# Altium PCB 拼板2.PcbDoc
Units mil, origin at the board's own origin, x right, y up, seen from the top; angles counter-clockwise.
Board outline 3265 x 493.35 mil, 2 copper layers (Top Layer, Bottom Layer); 27 components, 0 nets, 108 pads, 50 vias.
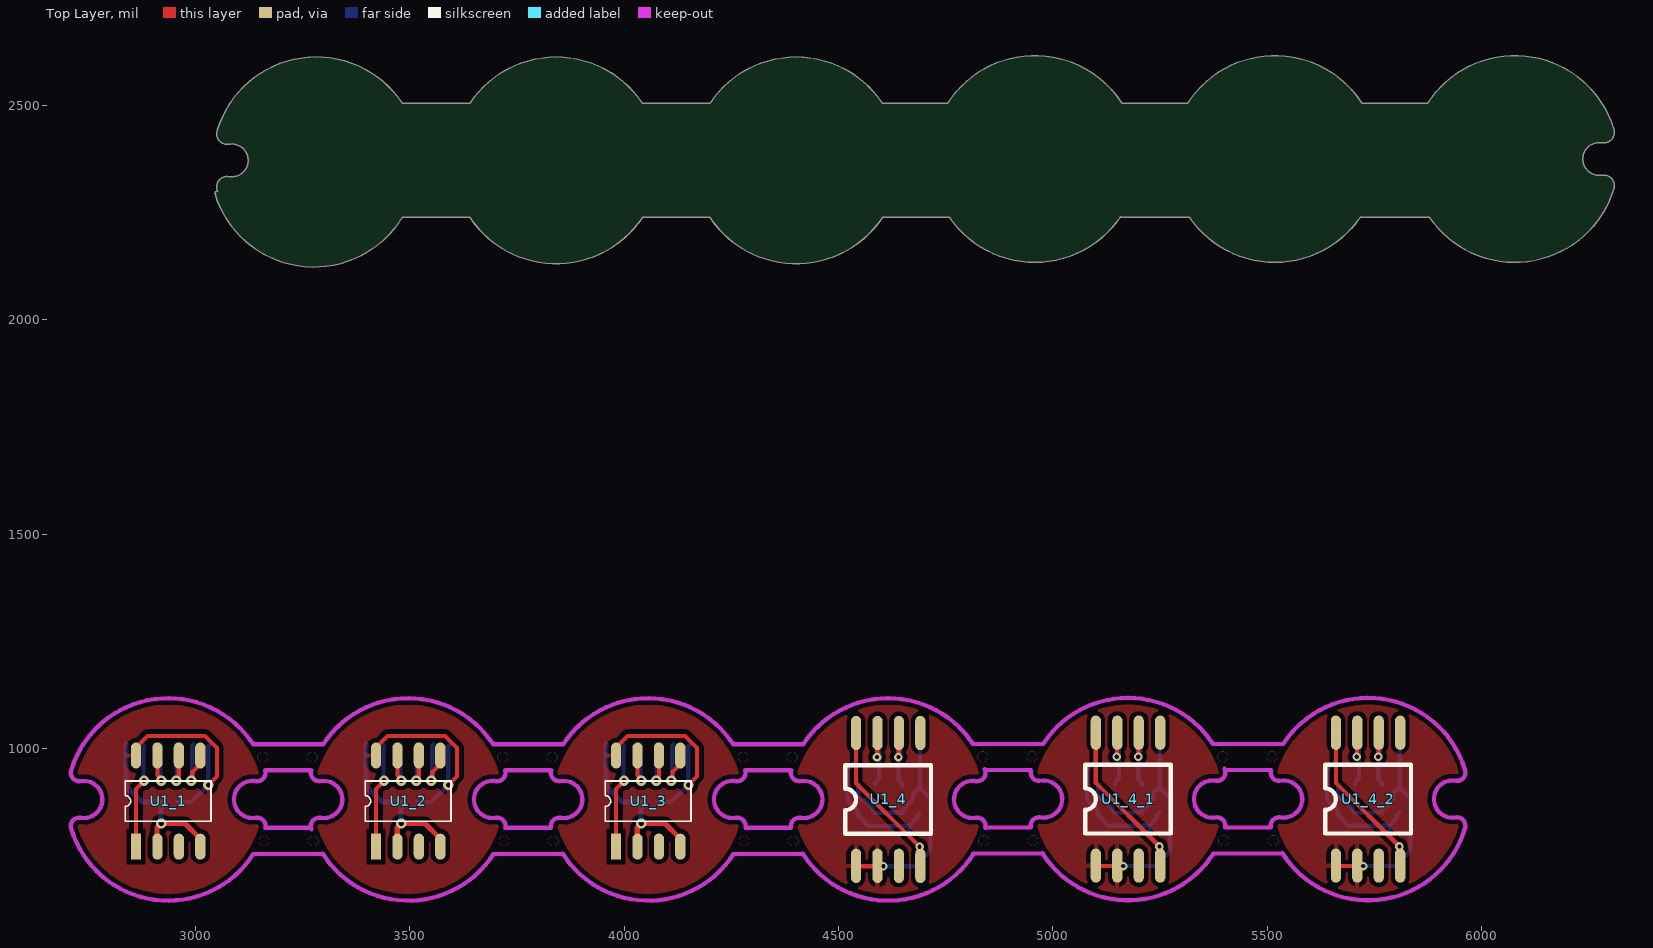
[diagram p0: Top Layer view]
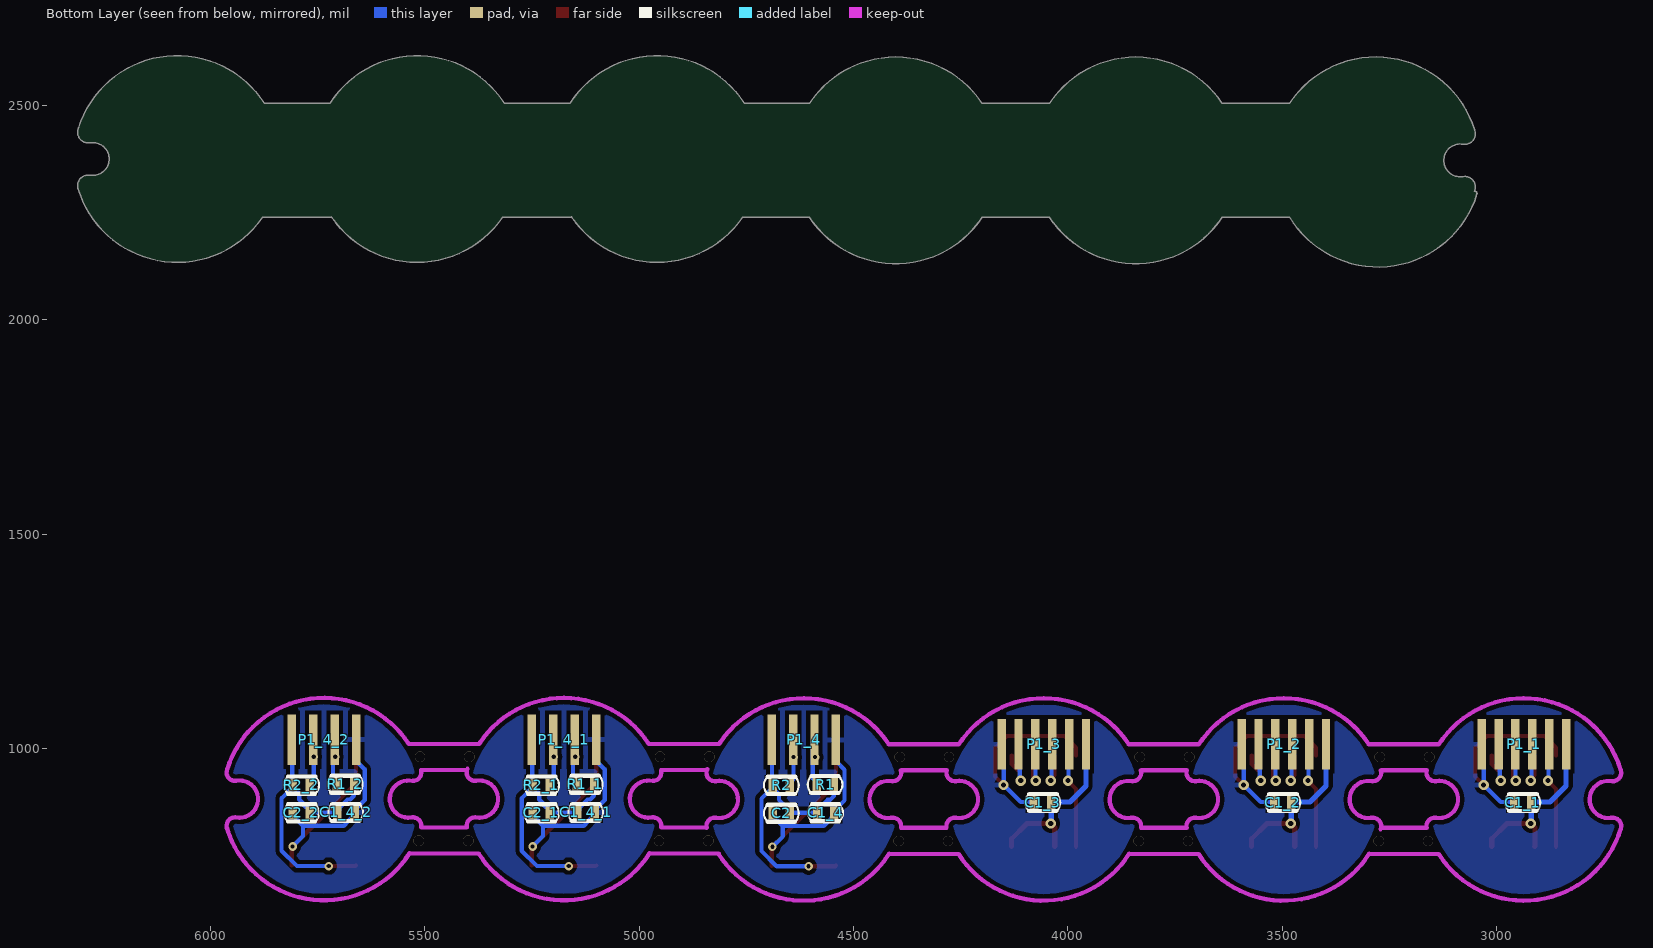
[diagram p1: Bottom Layer view, seen from below]

## Layer stack, top to bottom
Top Solder: solder mask 0.4, Solder Resist, Dk 3.5
Top Layer: signal copper 1.4
Dielectric 1: dielectric 12.6, FR-4, Dk 4.8
Bottom Layer: signal copper 1.4
Bottom Solder: solder mask 0.4, Solder Resist, Dk 3.5

## Board outline
3045.62,2293.44 cw(c3050.41,2294.92) 3051.63,2299.78 cw(c3055.74,2302.65) 3051.09,2300.8 cw(c3074.03,2309.93) 3078.35,2334.25 cw(c3078.67,2329.25) 3079.36,2334.21 ccw(c3084.66,2372.14) 3122.96,2372.14 ccw(c3084.66,2372.14) 3075.85,2409.4 cw(c3074.7,2414.28) 3072.71,2409.68 cw(c3074.03,2434.34) 3051.01,2443.28 cw(c3281.51,2372.14) 3482.23,2505.96 3640.8,2505.96 cw(c3841.51,2372.14) 4042.23,2505.96 4200.8,2505.96 cw(c4401.51,2372.14) 4602.23,2505.96 4755.35,2505.96 cw(c4958.22,2375.43) 5161.12,2505.92 cw(c5161.81,2500.95) 5161.81,2505.96 5315.35,2505.96 cw(c5518.22,2375.43) 5721.12,2505.92 cw(c5721.81,2500.95) 5721.81,2505.96 5875.35,2505.96 cw(c6078.22,2375.43) 6308.35,2447.78 cw(c6303.56,2446.28) 6308.51,2447.11 cw(c6285.7,2437.64) 6310.4,2437.64 cw(c6285.7,2437.64) 6283.03,2413.08 cw(c6282.61,2418.08) 6281.73,2413.14 ccw(c6275.07,2375.43) 6281.43,2337.67 cw(c6282.26,2332.73) 6282.59,2337.73 cw(c6285.7,2313.23) 6310.4,2313.23 cw(c6285.7,2313.23) 6309.89,2308.23 cw(c6304.98,2309.25) 6309.79,2307.84 cw(c6078.22,2375.43) 5878.6,2239.99 5720,2239.99 cw(c5720,2245) 5718.09,2240.36 cw(c5518.22,2375.43) 5318.6,2239.99 5160,2239.99 cw(c5160,2245) 5158.09,2240.36 cw(c4958.22,2375.43) 4758.6,2239.99 4603.33,2239.99 cw(c4401.51,2372.14) 4199.7,2239.99 4043.33,2239.99 cw(c3841.51,2372.14) 3639.7,2239.99 3482.85,2239.99 cw(c3276.18,2364.4)

## Design rules (kind name [scope] priority, off if disabled: settings)
Clearance [All] p1: gap=10 ignorepadtopadclearanceinfootprint=FALSE except(0: Arc-Hole Track-Hole SMDPad-Hole THPad-Hole Via-Hole Fill-Hole Poly-Hole Region-Hole Text-Hole)
PolygonConnect [All] p1: connectstyle=Relief reliefconductorwidth=10 reliefentries=4 polygonreliefangle="90 Angle" airgapwidth=10
RoutingVias [All] p1: holewidth=28 width=50 viastyle="Through Hole" minholewidth=28 minwidth=50 maxholewidth=28 maxwidth=50
SolderMaskExpansion [All] p1: expansion=4 istentingtop=FALSE
Width [All] p1: maxlimit=10 minlimit=10 preferedwidth=10
30 further rules are at their usual default settings.

## Components (designator, comment, footprint, x,y, rotation, side; value= is the part's Value field where it differs from the comment)
C1_1 "Cap" 0402-r 2920,875 r0 bottom (schematic designator C1)
C1_2 "Cap" 0402-r 3480,875 r0 bottom (schematic designator C1)
C1_3 "Cap" 0402-r 4040,875 r0 bottom (schematic designator C1)
C1_4 "Cap" 0402-r 4584,849 r180 bottom value=100nF (schematic designator C1)
C1_4_1 "Cap" 0402-r 5143.49,849.72 r180 bottom value=100nF (schematic designator C1)
C1_4_2 "Cap" 0402-r 5703.49,849.72 r180 bottom value=100nF (schematic designator C1)
C2 "Cap" 0402-r 4650,850 r0 bottom value=1uF
C2_1 "Cap" 0402-r 5209.49,850.72 r0 bottom value=1uF (schematic designator C2)
C2_2 "Cap" 0402-r 5769.49,850.72 r0 bottom value=1uF (schematic designator C2)
P1_1 "Header 6" 6-pin 2936.22,1010 r180 bottom (schematic designator P1)
P1_2 "Header 6" 6-pin 3496.22,1010 r180 bottom (schematic designator P1)
P1_3 "Header 6" 6-pin 4056.22,1010 r180 bottom (schematic designator P1)
P1_4 "Header 4" 4-pin 4616.22,1020 r0 bottom (schematic designator P1)
P1_4_1 "Header 4" 4-pin 5175.71,1020.72 r0 bottom (schematic designator P1)
P1_4_2 "Header 4" 4-pin 5735.71,1020.72 r0 bottom (schematic designator P1)
R1 "Res1" 0402-r 4585,915 r180 bottom value=4.7K
R1_1 "Res1" 0402-r 5144.49,915.72 r180 bottom value=4.7K (schematic designator R1)
R1_2 "Res1" 0402-r 5704.49,915.72 r180 bottom value=4.7K (schematic designator R1)
R2 "Res1" 0402-r 4650,915 r0 bottom value=4.7K
R2_1 "Res1" 0402-r 5209.49,915.72 r0 bottom value=4.7K (schematic designator R2)
R2_2 "Res1" 0402-r 5769.49,915.72 r0 bottom value=4.7K (schematic designator R2)
U1_1 "MT6816" SOP8 2861.22,770.98 r90 top locked (schematic designator U1)
U1_2 "MT6816" SOP8 3421.22,770.98 r90 top locked (schematic designator U1)
U1_3 "MT6816" SOP8 3981.22,770.98 r90 top locked (schematic designator U1)
U1_4 "AS5600" SOIC8 4616.22,881.22 r90 top locked (schematic designator U1)
U1_4_1 "AS5600" SOIC8 5175.71,881.94 r90 top locked (schematic designator U1)
U1_4_2 "AS5600" SOIC8 5735.71,881.94 r90 top locked (schematic designator U1)

## Footprints (in the part's own frame and the unit in brackets; to place one, negate y for a bottom-side part, rotate by r counter-clockwise, add the part's x,y. Pads: shape width x height; smd on the part's side, far side on the other; paste and mask are expansions set on the pad)
4-pin [mm]
  rect 0.5x3 smd: 1(-1.905,0) 2(-0.635,0) 3(0.635,0) 4(1.905,0)
6-pin [mm]
  rect 0.5x3 smd: 1(-2.5,0) 2(-1.5,0) 3(-0.5,0) 4(0.5,0) 5(1.5,0) 6(2.5,0)
0402-r [mil]
  rect 20x30 smd: 1(-1,1) 2(39,1)
  silkscreen extent -22,-19 59,21
SOIC8 [mil]
  oval 80x24 smd: 1(-155,75) 2(-155,25) 3(-155,-25) 4(-155,-75) 5(155,-75) 6(155,-25) 7(155,25) 8(155,75)
  silkscreen extent -80,-100 80,100
SOP8 [mil]
  rect 61x24 smd: 1(0,0)
  oval 61x24 smd: 2(0,-50) 3(0,-100) 4(0,-150) 5(212.6,-150) 6(212.6,-100) 7(212.6,-50) 8(212.6,0)
  silkscreen extent 60,-175 153,25

## Part data
C1_1 C1_2 C1_3 C1_4 C1_4_1 C1_4_2 C2 C2_1 C2_2: library part "Cap Semi", "Capacitor (Semiconductor SIM Model)", LatestRevisionDate=29-May-2009, LatestRevisionNote="IPC-7351 Footprint Added.", PackageDescription="Chip Capacitor", PackageReference=C1206, Published=8-Jun-2000, Publisher="Altium Limited"
P1_1 P1_2 P1_3: "Header, 6-Pin", LatestRevisionDate=17-Jul-2002, LatestRevisionNote="Re-released for DXP Platform.", Publisher="Altium Limited"
P1_4 P1_4_1 P1_4_2: "Header, 4-Pin", LatestRevisionDate=17-Jul-2002, LatestRevisionNote="Re-released for DXP Platform.", Publisher="Altium Limited"
R1 R1_1 R1_2 R2 R2_1 R2_2: "Resistor", LatestRevisionDate=17-Jul-2002, LatestRevisionNote="Re-released for DXP Platform.", PackageDescription="Axial Device, Thru-Hole; 2 Leads; 0.3 in Pin Spacing", PackageReference=AXIAL-0.3, Published=8-Jun-2000, Publisher="Altium Limited"

## Via types
v1: diameter 24, hole 24, Top Layer to Bottom Layer, 20 vias
v2: diameter 24, hole 12, Top Layer to Bottom Layer, 18 vias
v3: diameter 20, hole 10, Top Layer to Bottom Layer, 12 vias

## Nets (pads, with @x,y where several pads share a name; then routed paths per layer and width w, separated by ;. In a path a pad name is that pad's centre, name@x,y a point inside that pad or via, vN(x,y) a via of type N, cw(c..) or ccw(c..) an arc to the next point about the centre after c; other vN are vias at no path point)
pads on no net: C1_1.1 C1_1.2 C1_2.1 C1_2.2 C1_3.1 C1_3.2 C1_4.1 C1_4.2 C1_4_1.1 C1_4_1.2 C1_4_2.1 C1_4_2.2 C2.1 C2.2 C2_1.1 C2_1.2 C2_2.1 C2_2.2 P1_1.1 P1_1.2 P1_1.3 P1_1.4 P1_1.5 P1_1.6 P1_2.1 P1_2.2 P1_2.3 P1_2.4 P1_2.5 P1_2.6 P1_3.1 P1_3.2 P1_3.3 P1_3.4 P1_3.5 P1_3.6 P1_4.1 P1_4.2 P1_4.3 P1_4.4 P1_4_1.1 P1_4_1.2 P1_4_1.3 P1_4_1.4 P1_4_2.1 P1_4_2.2 P1_4_2.3 P1_4_2.4 R1.1 R1.2 R1_1.1 R1_1.2 R1_2.1 R1_2.2 R2.1 R2.2 R2_1.1 R2_1.2 R2_2.1 R2_2.2 U1_1.1 U1_1.2 U1_1.3 U1_1.4 U1_1.5 U1_1.6 U1_1.7 U1_1.8 U1_2.1 U1_2.2 U1_2.3 U1_2.4 U1_2.5 U1_2.6 U1_2.7 U1_2.8 U1_3.1 U1_3.2 U1_3.3 U1_3.4 U1_3.5 U1_3.6 U1_3.7 U1_3.8 U1_4.1 U1_4.2 U1_4.3 U1_4.4 U1_4.5 U1_4.6 U1_4.7 U1_4.8 U1_4_1.1 U1_4_1.2 U1_4_1.3 U1_4_1.4 U1_4_1.5 U1_4_1.6 U1_4_1.7 U1_4_1.8 U1_4_2.1 U1_4_2.2 U1_4_2.3 U1_4_2.4 U1_4_2.5 U1_4_2.6 U1_4_2.7 U1_4_2.8
copper on no net: | length 10491.4
  Top Layer w10: 2861.22,770.98 2861.22,905.6 2880,924.38 v2(2880,925) ; 2861.22,983.58 2861.22,1002.08 2888.22,1029.08 3022.4,1029.08 3050,1001.49 3050,935 v2(3030,915) ; 2911.22,983.58 2911.22,937.57 2920,928.79 v2(2920,925) ; v2(2955,925) 2955,928.79 2961.22,935.01 2961.22,983.58 ; v2(2990,925) 2992.68,927.68 2992.68,945.44 3011.22,963.98 3011.22,983.58 ; 3421.22,770.98 3421.22,905.6 3440,924.38 v2(3440,925) ; 3421.22,983.58 3421.22,1002.08 3448.22,1029.08 3582.4,1029.08 3610,1001.49 3610,935 v2(3590,915) ; 3471.22,983.58 3471.22,937.57 3480,928.79 v2(3480,925) ; v2(3515,925) 3515,928.79 3521.22,935.01 3521.22,983.58 ; v2(3550,925) 3552.68,927.68 3552.68,945.44 3571.22,963.98 3571.22,983.58 ; 3981.22,770.98 3981.22,905.6 4000,924.38 v2(4000,925) ; 3981.22,983.58 3981.22,1002.08 4008.22,1029.08 4142.4,1029.08 4170,1001.49 4170,935 v2(4150,915) ; 4031.22,983.58 4031.22,937.57 4040,928.79 v2(4040,925) ; v2(4075,925) 4075,928.79 4081.22,935.01 4081.22,983.58 ; v2(4110,925) 4112.68,927.68 4112.68,945.44 4131.22,963.98 4131.22,983.58 ; 4541.22,726.22 4542.44,725 v3(4605,725) ; 4541.22,1036.22 4541.22,918.78 4691.22,768.78 4691.22,726.22 ; v3(4590,980) 4590.61,980.61 4590.61,1035.61 4591.22,1036.22 ; v3(4640,980) 4640.61,980.61 4640.61,1035.61 4641.22,1036.22 ; 5100.71,726.94 5101.93,725.72 v3(5164.49,725.72) ; 5100.71,1036.94 5100.71,919.5 5250.71,769.5 5250.71,726.94 ; v3(5149.49,980.72) 5150.1,981.33 5150.1,1036.33 5150.71,1036.94 ; v3(5199.49,980.72) 5200.1,981.33 5200.1,1036.33 5200.71,1036.94 ; 5660.71,726.94 5661.93,725.72 v3(5724.49,725.72) ; 5660.71,1036.94 5660.71,919.5 5810.71,769.5 5810.71,726.94 ; v3(5709.49,980.72) 5710.1,981.33 5710.1,1036.33 5710.71,1036.94 ; v3(5759.49,980.72) 5760.1,981.33 5760.1,1036.33 5760.71,1036.94
  Top Layer w12: 2911.22,770.98 2910.61,771.59 2910.61,815.61 v2(2920,825) 2975.7,825 3011.22,789.48 3011.22,770.98 ; 3471.22,770.98 3470.61,771.59 3470.61,815.61 v2(3480,825) 3535.7,825 3571.22,789.48 3571.22,770.98 ; 4031.22,770.98 4030.61,771.59 4030.61,815.61 v2(4040,825) 4095.7,825 4131.22,789.48 4131.22,770.98
  Bottom Layer w10: 2877.16,1010 2878.58,1008.58 2878.58,926.42 v2(2880,925) ; 2916.53,1010 2918.27,1008.27 2918.27,926.73 v2(2920,925) ; v2(2955,925) 2955.45,925.45 2955.45,1009.55 2955.91,1010 ; 2959,874 2960,875 2990,875 3029.8,914.8 3029.8,1005.16 3034.65,1010 ; v2(2990,925) 2992.64,927.64 2992.64,1007.36 2995.28,1010 ; 3437.16,1010 3438.58,1008.58 3438.58,926.42 v2(3440,925) ; 3476.53,1010 3478.27,1008.27 3478.27,926.73 v2(3480,925) ; v2(3515,925) 3515.45,925.45 3515.45,1009.55 3515.91,1010 ; 3519,874 3520,875 3550,875 3589.8,914.8 3589.8,1005.16 3594.65,1010 ; v2(3550,925) 3552.64,927.64 3552.64,1007.36 3555.28,1010 ; 3997.16,1010 3998.58,1008.58 3998.58,926.42 v2(4000,925) ; 4036.53,1010 4038.27,1008.27 4038.27,926.73 v2(4040,925) ; v2(4075,925) 4075.45,925.45 4075.45,1009.55 4075.91,1010 ; 4079,874 4080,875 4110,875 4149.8,914.8 4149.8,1005.16 4154.65,1010 ; v2(4110,925) 4112.64,927.64 4112.64,1007.36 4115.28,1010 ; 4541.22,1020 4541.22,970.79 4521,950.57 4521,879 4545,855 4545,850 4545,845 4560,830 4560,828.79 4569.79,819 4665.21,819 4684,837.79 4684,844 4689,849 ; 4546,916 4546,889 4554.89,880.11 4561.11,880.11 4580,861.21 4580,855 4585,850 4648,850 4649,849 4649,854 4664.39,869.39 4664.39,870.61 4674,880.21 4674,894 4690.11,910.11 ; 4586,916 4586,921 4595,930 4595,1016.22 4591.22,1020 ; v3(4605,725) 4679.14,725 4715,760.86 4715,883 4690.11,907.89 4690.11,910.11 ; v3@4645,975 4645,1016.22 4641.22,1020 4640,1018.78 v3(4640,980) 4640,928 4649,919 4649,914 ; 4665,819 4665,795 v3(4689.39,770.61) ; 4691.22,1020 4690.11,1018.89 4690.11,910.11 ; 5100.71,1020.72 5100.71,971.51 5080.49,951.29 5080.49,879.72 5104.49,855.72 5104.49,850.72 5104.49,845.72 5119.49,830.72 5119.49,829.51 5129.27,819.72 5224.7,819.72 5243.49,838.51 5243.49,844.72 5248.49,849.72 ; 5105.49,916.72 5105.49,889.72 5114.38,880.83 5120.59,880.83 5139.49,861.94 5139.49,855.72 5144.49,850.72 5207.49,850.72 5208.49,849.72 5208.49,854.72 5223.88,870.12 5223.88,871.33 5233.49,880.94 5233.49,894.72 5249.6,910.83 ; 5145.49,916.72 5145.49,921.72 5154.49,930.72 5154.49,1016.94 5150.71,1020.72 ; v3(5164.49,725.72) 5238.63,725.72 5274.49,761.58 5274.49,883.72 5249.6,908.61 5249.6,910.83 ; v3@5204.49,975.72 5204.49,1016.94 5200.71,1020.72 5199.49,1019.5 v3(5199.49,980.72) 5199.49,928.72 5208.49,919.72 5208.49,914.72 ; 5224.49,819.72 5224.49,795.72 v3(5248.88,771.33) ; 5250.71,1020.72 5249.6,1019.61 5249.6,910.83 ; 5660.71,1020.72 5660.71,971.51 5640.49,951.29 5640.49,879.72 5664.49,855.72 5664.49,850.72 5664.49,845.72 5679.49,830.72 5679.49,829.51 5689.27,819.72 5784.7,819.72 5803.49,838.51 5803.49,844.72 5808.49,849.72 ; 5665.49,916.72 5665.49,889.72 5674.38,880.83 5680.59,880.83 5699.49,861.94 5699.49,855.72 5704.49,850.72 5767.49,850.72 5768.49,849.72 5768.49,854.72 5783.88,870.12 5783.88,871.33 5793.49,880.94 5793.49,894.72 5809.6,910.83 ; 5705.49,916.72 5705.49,921.72 5714.49,930.72 5714.49,1016.94 5710.71,1020.72 ; v3(5724.49,725.72) 5798.63,725.72 5834.49,761.58 5834.49,883.72 5809.6,908.61 5809.6,910.83 ; v3@5764.49,975.72 5764.49,1016.94 5760.71,1020.72 5759.49,1019.5 v3(5759.49,980.72) 5759.49,928.72 5768.49,919.72 5768.49,914.72 ; 5784.49,819.72 5784.49,795.72 v3(5808.88,771.33) ; 5810.71,1020.72 5809.6,1019.61 5809.6,910.83
  Bottom Layer w12: 2837.79,1010 2837.79,912.21 2875,875 2920,875 ; 2919,874 2919,826 v2(2920,825) ; 3397.79,1010 3397.79,912.21 3435,875 3480,875 ; 3479,874 3479,826 v2(3480,825) ; 3957.79,1010 3957.79,912.21 3995,875 4040,875 ; 4039,874 4039,826 v2(4040,825)
  other v1: 3159.71,784.08 3274.71,784.08 3719.71,784.08 3834.71,784.08 4279.71,784.08 4394.71,784.08 4839.19,784.81 4954.19,784.81 5399.19,784.81 5514.19,784.81 3157.15,980.03 3272.15,980.03 3717.15,980.03 3832.15,980.03 4277.15,980.03 4392.15,980.03 4836.64,980.75 4951.64,980.75 5396.64,980.75 5511.64,980.75

## Polygon pours and split planes (outlines as drawn)
no net on Top Layer "Top Layer-No Net" (solid, pour order 50): 5509.94,812.46 cw(c5528.23,819.74) 5532.84,838.88 5532.86,839.05 ccw(c5538.86,881.94) 5528.89,924.09 5528.8,924.47 cw(c5528.23,944.15) 5509.94,951.43 cw(c5735.71,881.94) 5961.05,952.79 5960.91,952.72 cw(c5943.19,944.15) 5940.11,924.7 5940.09,924.59 ccw(c5932.56,881.94) 5939.75,839.24 5939.77,839.12 cw(c5943.19,819.74) 5962.46,815.75 cw(c5735.71,881.94)
no net on Top Layer "Top Layer-No Net" (solid, pour order 48): 4949.94,812.46 cw(c4968.23,819.74) 4972.84,838.88 4972.86,839.05 ccw(c4978.86,881.94) 4968.89,924.09 4968.8,924.47 cw(c4968.23,944.15) 4949.94,951.43 cw(c5175.71,881.94) 5401.05,952.79 5400.91,952.72 cw(c5383.19,944.15) 5380.11,924.7 5380.09,924.59 ccw(c5372.56,881.94) 5379.75,839.24 5379.77,839.12 cw(c5383.19,819.74) 5402.46,815.75 cw(c5175.71,881.94)
no net on Top Layer "Top Layer-No Net" (solid, pour order 46): 4390.45,811.73 cw(c4408.74,819.02) 4413.35,838.15 4413.38,838.33 ccw(c4419.37,881.22) 4409.4,923.36 4409.31,923.75 cw(c4408.74,943.42) 4390.45,950.71 cw(c4616.22,881.22) 4841.57,952.06 4841.42,951.99 cw(c4823.7,943.42) 4820.63,923.98 4820.61,923.87 ccw(c4813.07,881.22) 4820.26,838.51 4820.28,838.4 cw(c4823.7,819.02) 4842.98,815.03 cw(c4616.22,881.22)
no net on Top Layer "Top Layer-No Net" (solid, pour order 38): 3830.45,811.73 cw(c3848.74,819.02) 3853.35,838.15 3853.38,838.33 ccw(c3859.37,881.22) 3849.4,923.36 3849.31,923.75 cw(c3848.74,943.42) 3830.45,950.71 cw(c4056.22,881.22) 4281.57,952.06 4281.42,951.99 cw(c4263.7,943.42) 4260.63,923.98 4260.61,923.87 ccw(c4253.07,881.22) 4260.26,838.51 4260.28,838.4 cw(c4263.7,819.02) 4282.98,815.03 cw(c4056.22,881.22)
no net on Top Layer "Top Layer-No Net" (solid, pour order 36): 3270.45,811.73 cw(c3288.74,819.02) 3293.35,838.15 3293.38,838.33 ccw(c3299.37,881.22) 3289.4,923.36 3289.31,923.75 cw(c3288.74,943.42) 3270.45,950.71 cw(c3496.22,881.22) 3721.57,952.06 3721.42,951.99 cw(c3703.7,943.42) 3700.63,923.98 3700.61,923.87 ccw(c3693.07,881.22) 3700.26,838.51 3700.28,838.4 cw(c3703.7,819.02) 3722.98,815.03 cw(c3496.22,881.22)
no net on Top Layer "Top Layer-No Net" (solid, pour order 34): 2710.45,811.73 cw(c2728.74,819.02) 2733.35,838.15 2733.38,838.33 ccw(c2739.37,881.22) 2729.4,923.36 2729.31,923.75 cw(c2728.74,943.42) 2710.45,950.71 cw(c2936.22,881.22) 3161.57,952.06 3161.42,951.99 cw(c3143.7,943.42) 3140.63,923.98 3140.61,923.87 ccw(c3133.07,881.22) 3140.26,838.51 3140.28,838.4 cw(c3143.7,819.02) 3162.98,815.03 cw(c2936.22,881.22)
no net on Bottom Layer "Top Layer-No Net1" (solid, pour order 51): 5509.94,812.46 cw(c5528.23,819.74) 5532.84,838.88 5532.86,839.05 ccw(c5538.86,881.94) 5528.89,924.09 5528.8,924.47 cw(c5528.23,944.15) 5509.94,951.43 cw(c5735.71,881.94) 5961.05,952.79 5960.91,952.72 cw(c5943.19,944.15) 5940.11,924.7 5940.09,924.59 ccw(c5932.56,881.94) 5939.75,839.24 5939.77,839.12 cw(c5943.19,819.74) 5962.46,815.75 cw(c5735.71,881.94)
no net on Bottom Layer "Top Layer-No Net1" (solid, pour order 49): 4949.94,812.46 cw(c4968.23,819.74) 4972.84,838.88 4972.86,839.05 ccw(c4978.86,881.94) 4968.89,924.09 4968.8,924.47 cw(c4968.23,944.15) 4949.94,951.43 cw(c5175.71,881.94) 5401.05,952.79 5400.91,952.72 cw(c5383.19,944.15) 5380.11,924.7 5380.09,924.59 ccw(c5372.56,881.94) 5379.75,839.24 5379.77,839.12 cw(c5383.19,819.74) 5402.46,815.75 cw(c5175.71,881.94)
no net on Bottom Layer "Top Layer-No Net1" (solid, pour order 47): 4390.45,811.73 cw(c4408.74,819.02) 4413.35,838.15 4413.38,838.33 ccw(c4419.37,881.22) 4409.4,923.36 4409.31,923.75 cw(c4408.74,943.42) 4390.45,950.71 cw(c4616.22,881.22) 4841.57,952.06 4841.42,951.99 cw(c4823.7,943.42) 4820.63,923.98 4820.61,923.87 ccw(c4813.07,881.22) 4820.26,838.51 4820.28,838.4 cw(c4823.7,819.02) 4842.98,815.03 cw(c4616.22,881.22)
no net on Bottom Layer "Top Layer-No Net1" (solid, pour order 39): 3830.45,811.73 cw(c3848.74,819.02) 3853.35,838.15 3853.38,838.33 ccw(c3859.37,881.22) 3849.4,923.36 3849.31,923.75 cw(c3848.74,943.42) 3830.45,950.71 cw(c4056.22,881.22) 4281.57,952.06 4281.42,951.99 cw(c4263.7,943.42) 4260.63,923.98 4260.61,923.87 ccw(c4253.07,881.22) 4260.26,838.51 4260.28,838.4 cw(c4263.7,819.02) 4282.98,815.03 cw(c4056.22,881.22)
no net on Bottom Layer "Top Layer-No Net1" (solid, pour order 37): 3270.45,811.73 cw(c3288.74,819.02) 3293.35,838.15 3293.38,838.33 ccw(c3299.37,881.22) 3289.4,923.36 3289.31,923.75 cw(c3288.74,943.42) 3270.45,950.71 cw(c3496.22,881.22) 3721.57,952.06 3721.42,951.99 cw(c3703.7,943.42) 3700.63,923.98 3700.61,923.87 ccw(c3693.07,881.22) 3700.26,838.51 3700.28,838.4 cw(c3703.7,819.02) 3722.98,815.03 cw(c3496.22,881.22)
no net on Bottom Layer "Top Layer-No Net1" (solid, pour order 35): 2710.45,811.73 cw(c2728.74,819.02) 2733.35,838.15 2733.38,838.33 ccw(c2739.37,881.22) 2729.4,923.36 2729.31,923.75 cw(c2728.74,943.42) 2710.45,950.71 cw(c2936.22,881.22) 3161.57,952.06 3161.42,951.99 cw(c3143.7,943.42) 3140.63,923.98 3140.61,923.87 ccw(c3133.07,881.22) 3140.26,838.51 3140.28,838.4 cw(c3143.7,819.02) 3162.98,815.03 cw(c2936.22,881.22)

## Keep-outs
Keep-Out Layer:
  lines w10: 2729.31,923.75 cw(c2728.74,943.42) 2710.45,950.71 cw(c2936.22,881.22) 3134.43,1009.73 ; 2729.4,923.36 cw(c2739.37,881.22) 2733.38,838.33 ; 2733.35,838.15 ccw(c2728.74,819.02) 2710.45,811.73 ccw(c2936.22,881.22) 3135.31,754.08 3295.35,754.08 ; 3134.9,1010.03 3297.15,1010.03 ; 3140.26,838.51 cw(c3133.07,881.22) 3140.61,923.87 ; 3140.28,838.4 cw(c3143.7,819.02) 3162.98,815.03 3267.15,815.03 ; 3140.63,923.98 ccw(c3143.7,943.42) 3162.71,948.54 ; 3162.71,949.08 3268.88,949.08 ; 3269.81,948.82 ccw(c3288.74,943.42) 3289.31,923.75 ; 3270.45,811.73 cw(c3288.74,819.02) 3293.35,838.15 ; 3289.4,923.36 cw(c3299.37,881.22) 3293.38,838.33 ; 3296.62,754.89 ccw(c3496.22,881.22) 3695.31,754.08 3855.35,754.08 ; 3297.9,1009.55 cw(c3496.22,881.22) 3694.43,1009.73 ; 3694.9,1010.03 3857.15,1010.03 ; 3700.26,838.51 cw(c3693.07,881.22) 3700.61,923.87 ; 3700.28,838.4 cw(c3703.7,819.02) 3722.98,815.03 3827.15,815.03 ; 3700.63,923.98 ccw(c3703.7,943.42) 3722.71,948.54 ; 3722.71,949.08 3828.88,949.08 ; 3829.38,815.44 cw(c3848.74,819.02) 3853.35,838.15 ; 3829.81,948.82 ccw(c3848.74,943.42) 3849.31,923.75 ; 3849.4,923.36 cw(c3859.37,881.22) 3853.38,838.33 ; 3856.62,754.89 ccw(c4056.22,881.22) 4255.31,754.08 4415.35,754.08 ; 3857.9,1009.55 cw(c4056.22,881.22) 4254.43,1009.73 ; 4254.9,1010.03 4417.15,1010.03 ; 4260.26,838.51 cw(c4253.07,881.22) 4260.61,923.87 ; 4260.28,838.4 cw(c4263.7,819.02) 4282.98,815.03 4387.15,815.03 ; 4260.63,923.98 ccw(c4263.7,943.42) 4282.71,948.54 ; 4282.71,949.08 4388.88,949.08 ; 4389.38,815.44 cw(c4408.74,819.02) 4413.35,838.15 ; 4389.81,948.82 ccw(c4408.74,943.42) 4409.31,923.75 ; 4409.4,923.36 cw(c4419.37,881.22) 4413.38,838.33 ; 4416.62,754.89 ccw(c4616.22,881.22) 4815.77,754.81 ; 4417.9,1009.55 cw(c4616.22,881.22) 4813.95,1010.47 ; 4814.39,1010.75 4976.64,1010.75 ; 4814.79,754.81 4974.83,754.81 ; 4820.26,838.51 cw(c4813.07,881.22) 4820.61,923.87 ; 4820.28,838.4 cw(c4823.7,819.02) 4842.98,815.03 ; 4820.63,923.98 ccw(c4823.7,943.42) 4841.42,951.99 ; 4842.19,949.81 4948.37,949.81 ; 4842.46,815.75 4946.64,815.75 ; 4948.87,816.17 cw(c4968.23,819.74) 4972.84,838.88 ; 4949.29,949.54 ccw(c4968.23,944.15) 4968.8,924.47 ; 4968.89,924.09 cw(c4978.86,881.94) 4972.86,839.05 ; 4976.11,755.61 ccw(c5175.71,881.94) 5374.79,754.81 5534.83,754.81 ; 4977.38,1010.27 cw(c5175.71,881.94) 5373.92,1010.45 ; 5374.39,1010.75 5536.64,1010.75 ; 5379.77,839.13 cw(c5383.19,819.74) 5402.46,815.75 5506.64,815.75 ; 5379.75,839.24 cw(c5372.56,881.94) 5380.09,924.59 ; 5380.11,924.7 ccw(c5383.19,944.15) 5400.91,952.72 ; 5402.19,949.81 5508.37,949.81 ; 5508.87,816.17 cw(c5528.23,819.74) 5532.84,838.88 ; 5509.29,949.54 ccw(c5528.23,944.15) 5528.8,924.47 ; 5528.89,924.09 cw(c5538.86,881.94) 5532.86,839.05 ; 5536.11,755.61 ccw(c5735.71,881.94) 5962.46,815.75 ccw(c5943.19,819.74) 5939.77,839.13 ; 5537.38,1010.27 cw(c5735.71,881.94) 5961.05,952.79 ; 5939.75,839.24 cw(c5932.56,881.94) 5940.09,924.59 ; 5940.11,924.7 ccw(c5943.19,944.15) 5960.91,952.72